# EAGLE board ArrayC_v2zp (EAGLE 7.5.0)
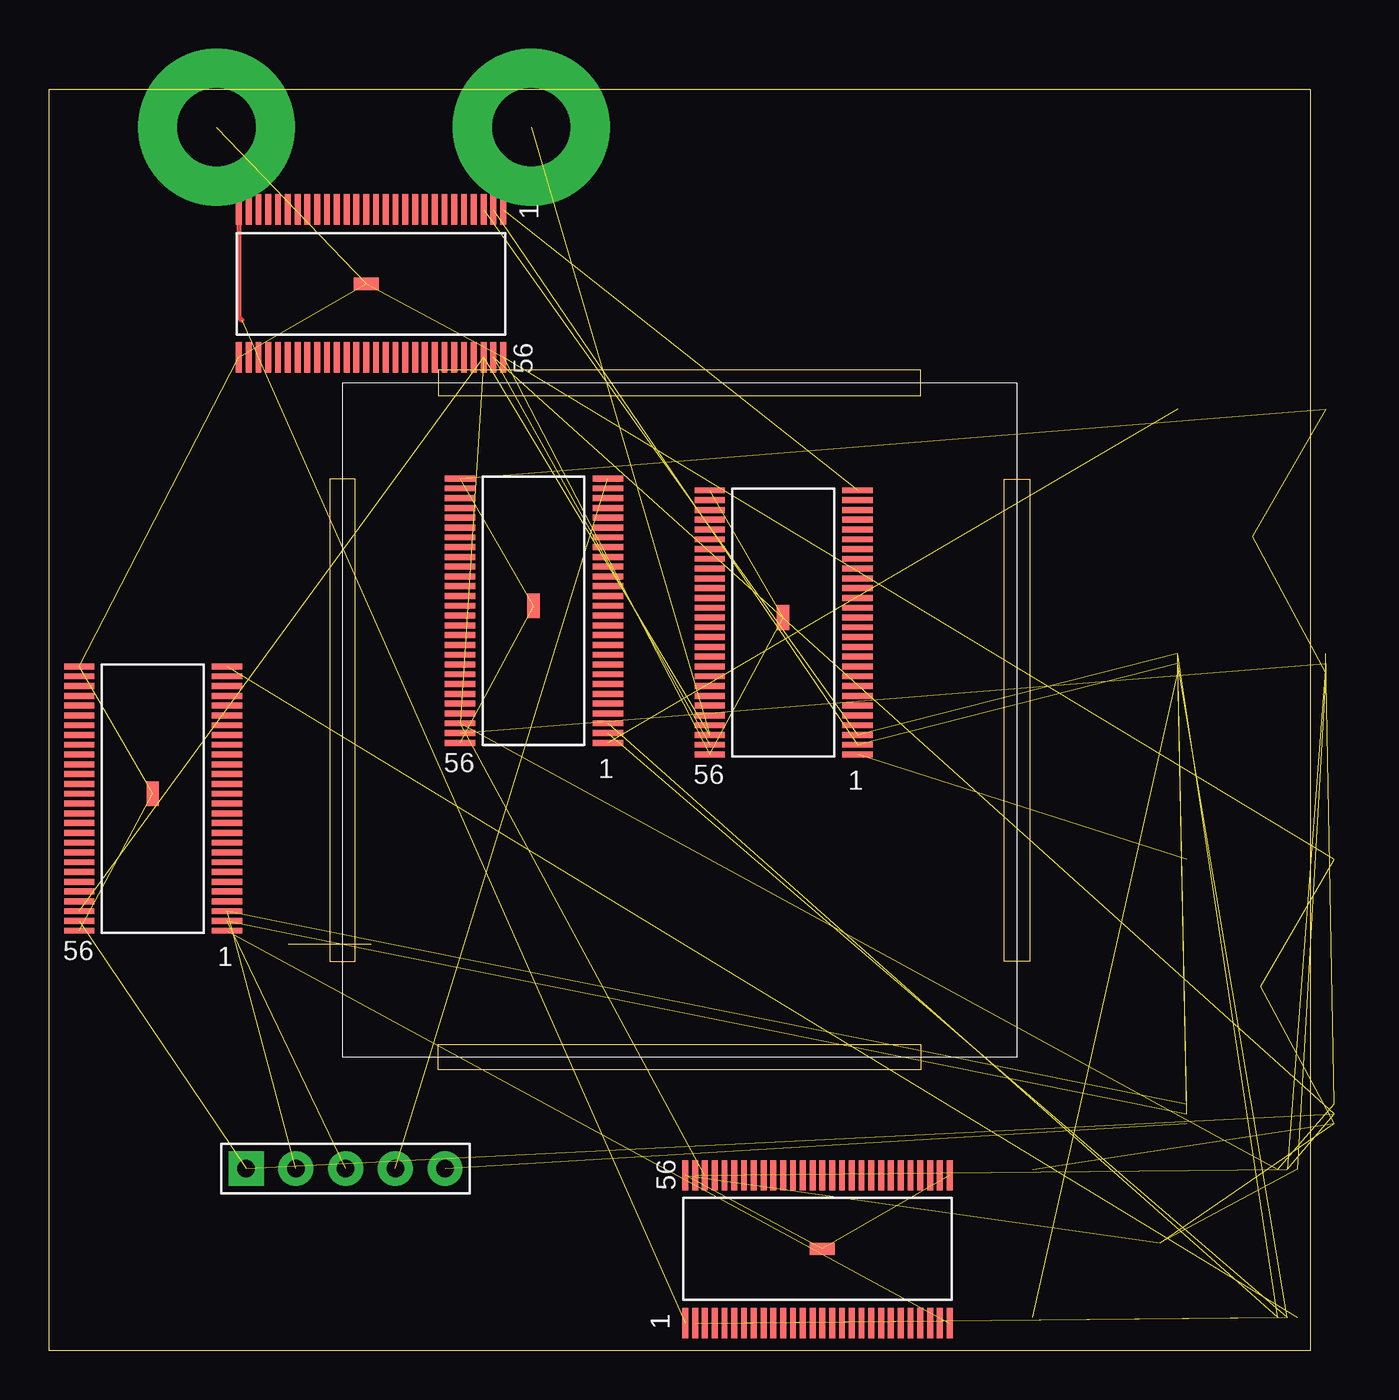
[diagram p0: board, top side]
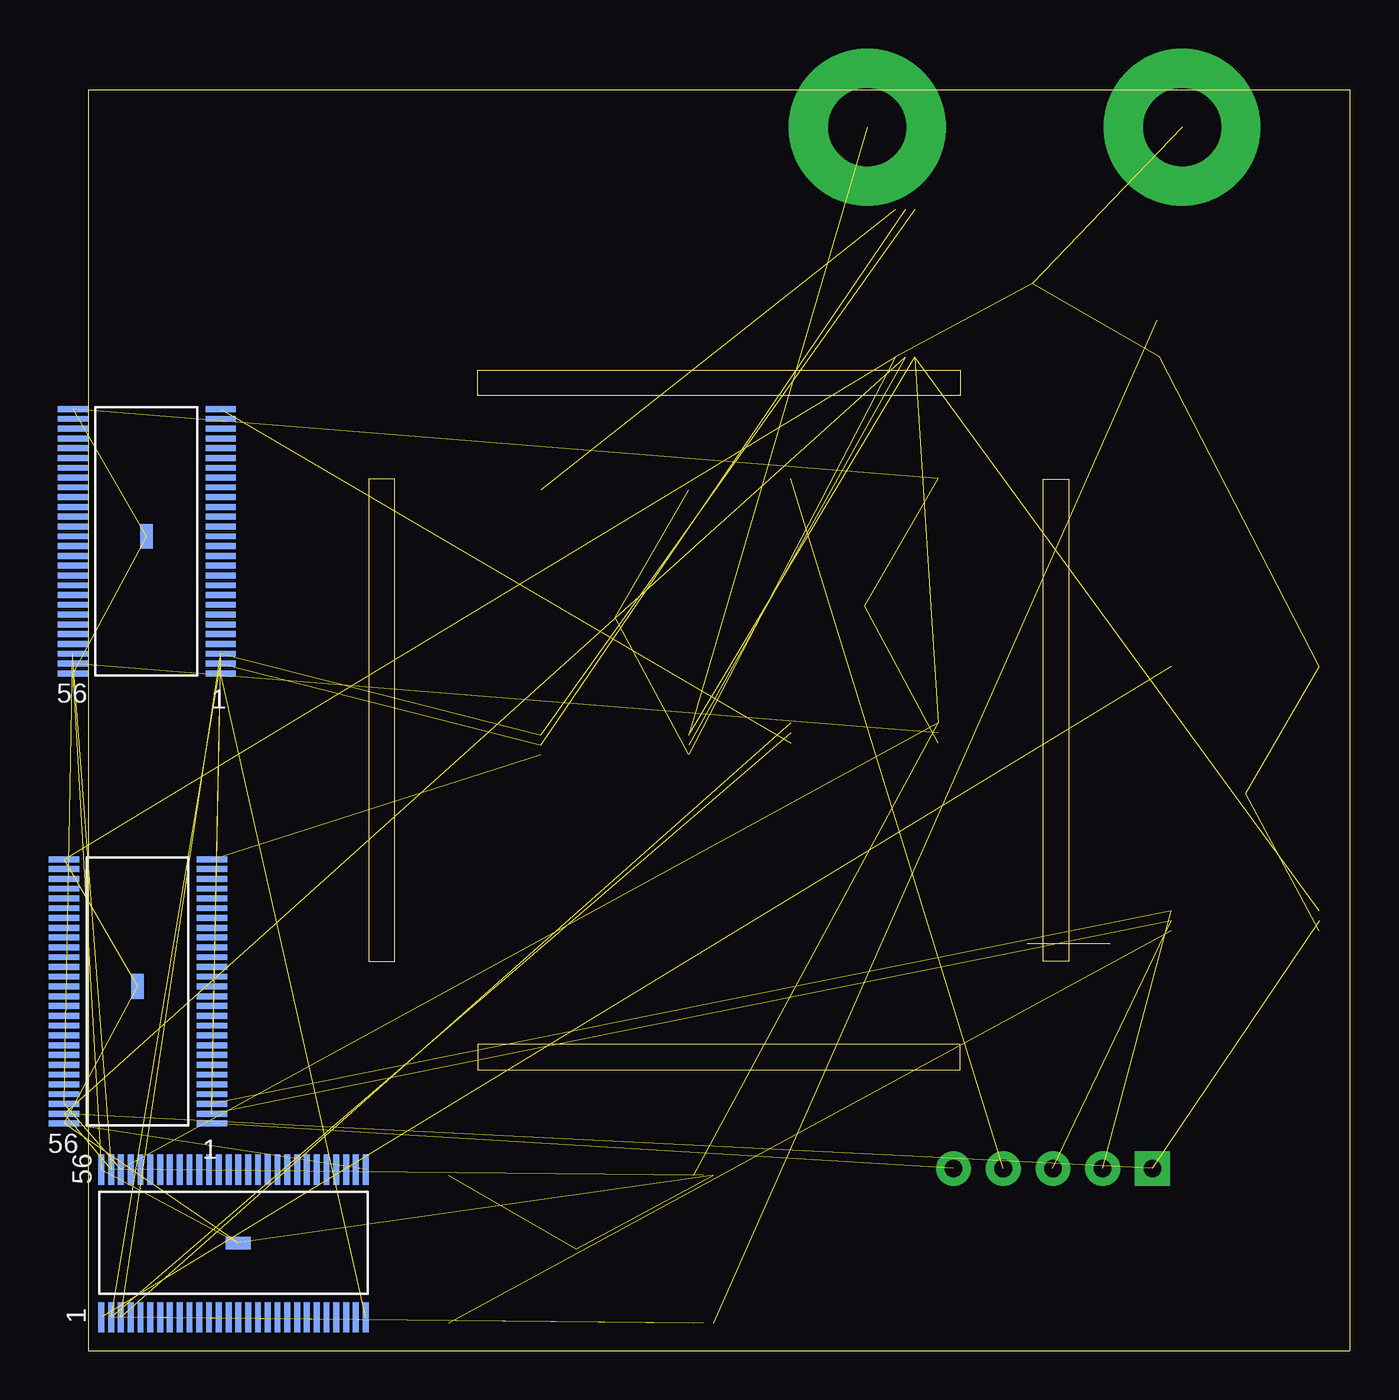
[diagram p1: board, bottom side, seen from below]

Size 64.42 x 64.42 mm. Coordinates in mm from the lower left corner, seen from the top.
Outline: 12.22,20.77 16.45,20.77
Outline: 48.78,44.53 50.08,44.53 50.08,19.89 48.78,19.89 48.78,44.53
Outline: 64.42,64.42 64.42,0 0,0 0,64.42 64.42,64.42
Outline: 44.53,48.78 44.53,50.08 19.89,50.08 19.89,48.78 44.53,48.78
Outline: 15.64,44.53 14.33,44.53 14.33,19.89 15.64,19.89 15.64,44.53
Outline: 44.53,15.64 44.53,14.33 19.89,14.33 19.89,15.64 44.53,15.64
Copper layers (1*16): Top 0.035mm / dielectric 1.5mm / Bottom 0.035mm
Design rules "SparkFun": minimum track width 8mil, minimum drill 20mil, track to track 8mil, track to pad 8mil, pad to pad 8mil, via to via 8mil, smd to smd 8mil, copper to edge 10mil, drill to drill 8mil, minimum pad ring 12mil, minimum via ring 10mil, stop-mask expansion 4mil, vias tented up to drill 25mil, thermal gap 10mil

## Footprints (pad centres in the part's own frame; a part is rotated, then mirrored left to right if it is on the bottom)
56-HTSSOP = smd 0.3 x 1.55: P1 -7,-3.8; P2 -6.5,-3.8; P3 -6,-3.8; P4 -5.5,-3.8; P5 -5,-3.8; P6 -4.5,-3.8; P7 -4,-3.8; P8 -3.5,-3.8; P9 -3,-3.8; P10 -2.5,-3.8; P11 -2,-3.8; P12 -1.5,-3.8; P13 -1,-3.8; P14 -0.5,-3.8; P15 0,-3.8; P16 0.5,-3.8; P17 1,-3.8; P18 1.5,-3.8; P19 2,-3.8; P20 2.5,-3.8; P21 3,-3.8; P22 3.5,-3.8; P23 4,-3.8; P24 4.5,-3.8; P25 5,-3.8; P26 5.5,-3.8; P27 6,-3.8; P28 6.5,-3.8; P29 6.5,3.75; P30 6,3.75; P31 5.5,3.75; P32 5,3.75; P33 4.5,3.75; P34 4,3.75; P35 3.5,3.75; P36 3,3.75; P37 2.5,3.75; P38 2,3.75; P39 1.5,3.75; P40 1,3.75; P41 0.5,3.75; P42 0,3.75; P43 -0.5,3.75; P44 -1,3.75; P45 -1.5,3.75; P46 -2,3.75; P47 -2.5,3.75; P48 -3,3.75; P49 -3.5,3.75; P50 -4,3.75; P51 -4.5,3.75; P52 -5,3.75; P53 -5.5,3.75; P54 -6,3.75; P55 -6.5,3.75; P56 -7,3.75 | smd 1.27 x 0.635: P$1 0,0
5PIN_HOLES = drill 0.9 pad 1.778 square: P1 -5.08,0 | drill 0.9 pad 1.778: P2 -2.54,0; P3 0,0; P4 2.54,0; P5 5.08,0
2PIN_HOLES_PWR = drill 4 pad 8: P$1 0,0; P$2 16.08,0

## Placement (x,y rotation side)
U$1  TLC5955V0  [56-HTSSOP]  5.3,28.45 90 top
U$2  TLC5955V0  [56-HTSSOP]  56.75,5.5 0 bottom
U$3  TLC5955V0  [56-HTSSOP]  61.9,18.6 90 bottom
U$4  TLC5955V0  [56-HTSSOP]  37.5,37.45 90 top
U$5  TLC5955V0  [56-HTSSOP]  16.2,54.5 180 top
U$6  TLC5955V0  [56-HTSSOP]  61.45,41.6 90 bottom
U$7  TLC5955V0  [56-HTSSOP]  39.5,5.2 0 top
U$8  TLC5955V0  [56-HTSSOP]  24.75,38.05 90 top
U$9  5_PINSV1  [5PIN_HOLES]  15.15,9.3 0 top
U$10  2PIN_PWR0.1HEADER  [2PIN_HOLES_PWR]  8.55,62.5 0 top

## Library data of the parts
U$1-U$10 = WallerLabLib

## Nets
3.3V: U$1.P54 U$2.P54 U$3.P54 U$4.P54 U$5.P54 U$6.P54 U$7.P54 U$8.P54 U$10.P$2
GND: U$1.P29 U$1.P56 U$1.P$1 U$2.P29 U$2.P56 U$2.P$1 U$3.P29 U$3.P56 U$3.P$1 U$4.P29 U$4.P56 U$4.P$1 U$5.P29 U$5.P56 U$5.P$1 U$6.P29 U$6.P56 U$6.P$1 U$7.P29 U$7.P56 U$7.P$1 U$8.P29 U$8.P56 U$8.P$1 U$10.P$1
GSCLK: U$1.P55 U$2.P55 U$3.P55 U$4.P55 U$5.P55 U$6.P55 U$7.P55 U$8.P55 U$9.P1
LAT: U$1.P3 U$2.P3 U$3.P3 U$4.P3 U$5.P3 U$6.P3 U$7.P3 U$8.P3 U$9.P2
N$1: U$1.P8
N$2: U$1.P9
N$3: U$1.P7
N$4: U$1.P14
N$5: U$1.P15
N$6: U$1.P13
N$7: U$1.P17
N$8: U$1.P18
N$9: U$1.P16
N$10: U$1.P23
N$11: U$1.P24
N$12: U$1.P22
N$13: U$1.P5
N$14: U$1.P6
N$15: U$1.P4
N$16: U$1.P11
N$17: U$1.P12
N$18: U$1.P10
N$19: U$1.P20
N$20: U$1.P21
N$21: U$1.P19
N$22: U$1.P26
N$23: U$1.P27
N$24: U$1.P25
N$25: U$1.P53
N$26: U$1.P51
N$27: U$1.P52
N$28: U$1.P47
N$29: U$1.P45
N$30: U$1.P46
N$31: U$1.P38
N$32: U$1.P36
N$33: U$1.P37
N$34: U$1.P32
N$35: U$1.P30
N$36: U$1.P50
N$37: U$1.P48
N$38: U$1.P49
N$39: U$1.P44
N$40: U$1.P42
N$41: U$1.P43
N$42: U$1.P41
N$43: U$1.P39
N$44: U$1.P40
N$45: U$1.P35
N$46: U$1.P33
N$47: U$1.P34
N$48: U$2.P8
N$49: U$2.P9
N$50: U$2.P7
N$51: U$2.P14
N$52: U$2.P15
N$53: U$2.P13
N$54: U$2.P17
N$55: U$2.P18
N$56: U$2.P16
N$57: U$2.P23
N$58: U$2.P24
N$59: U$2.P22
N$60: U$2.P5
N$61: U$2.P6
N$62: U$2.P4
N$63: U$2.P11
N$64: U$2.P12
N$65: U$2.P10
N$66: U$2.P20
N$67: U$2.P21
N$68: U$2.P19
N$69: U$2.P26
N$70: U$2.P27
N$71: U$2.P25
N$72: U$2.P53
N$73: U$2.P51
N$74: U$2.P52
N$75: U$2.P47
N$76: U$2.P45
N$77: U$2.P46
N$78: U$2.P38
N$79: U$2.P36
N$80: U$2.P37
N$81: U$2.P32
N$82: U$2.P30
N$83: U$2.P50
N$84: U$2.P48
N$85: U$2.P49
N$86: U$2.P44
N$87: U$2.P42
N$88: U$2.P43
N$89: U$2.P41
N$90: U$2.P39
N$91: U$2.P40
N$92: U$2.P35
N$93: U$2.P33
N$94: U$2.P34
N$95: U$3.P8
N$96: U$3.P9
N$97: U$3.P7
N$98: U$3.P14
N$99: U$3.P15
N$100: U$3.P13
N$101: U$3.P17
N$102: U$3.P18
N$103: U$3.P16
N$104: U$3.P23
N$105: U$3.P24
N$106: U$3.P22
N$107: U$3.P5
N$108: U$3.P6
N$109: U$3.P4
N$110: U$3.P11
N$111: U$3.P12
N$112: U$3.P10
N$113: U$3.P20
N$114: U$3.P21
N$115: U$3.P19
N$116: U$3.P26
N$117: U$3.P27
N$118: U$3.P25
N$119: U$3.P53
N$120: U$3.P51
N$121: U$3.P52
N$122: U$3.P47
N$123: U$3.P45
N$124: U$3.P46
N$125: U$3.P38
N$126: U$3.P36
N$127: U$3.P37
N$128: U$3.P32
N$129: U$3.P30
N$130: U$3.P50
N$131: U$3.P48
N$132: U$3.P49
N$133: U$3.P44
N$134: U$3.P42
N$135: U$3.P43
N$136: U$3.P41
N$137: U$3.P39
N$138: U$3.P40
N$139: U$3.P35
N$140: U$3.P33
N$141: U$3.P34
N$142: U$5.P8
N$143: U$4.P8
N$144: U$4.P9
N$145: U$4.P7
N$146: U$4.P14
N$147: U$4.P15
N$148: U$4.P13
N$149: U$4.P17
N$150: U$4.P18
N$151: U$4.P16
N$152: U$4.P23
N$153: U$4.P24
N$154: U$4.P22
N$155: U$4.P5
N$156: U$4.P6
N$157: U$4.P4
N$158: U$4.P11
N$159: U$4.P12
N$160: U$4.P10
N$161: U$4.P20
N$162: U$4.P21
N$163: U$4.P19
N$164: U$4.P26
N$165: U$4.P27
N$166: U$4.P25
N$167: U$4.P53
N$168: U$4.P51
N$169: U$4.P52
N$170: U$4.P47
N$171: U$4.P45
N$172: U$4.P46
N$173: U$4.P38
N$174: U$4.P36
N$175: U$4.P37
N$176: U$4.P32
N$177: U$4.P30
N$178: U$4.P50
N$179: U$4.P48
N$180: U$4.P49
N$181: U$4.P44
N$182: U$4.P42
N$183: U$4.P43
N$184: U$4.P41
N$185: U$4.P39
N$186: U$4.P40
N$187: U$4.P35
N$188: U$4.P33
N$189: U$4.P34
N$190: U$5.P9
N$191: U$5.P7
N$192: U$5.P14
N$193: U$5.P15
N$194: U$5.P13
N$195: U$5.P17
N$196: U$5.P18
N$197: U$5.P16
N$198: U$5.P23
N$199: U$5.P24
N$200: U$5.P22
N$201: U$5.P5
N$202: U$5.P6
N$203: U$5.P4
N$204: U$5.P11
N$205: U$5.P12
N$206: U$5.P10
N$207: U$5.P20
N$208: U$5.P21
N$209: U$5.P19
N$210: U$5.P26
N$211: U$5.P27
N$212: U$5.P25
N$213: U$5.P53
N$214: U$5.P51
N$215: U$5.P52
N$216: U$5.P47
N$217: U$5.P45
N$218: U$5.P46
N$219: U$5.P38
N$220: U$5.P36
N$221: U$5.P37
N$222: U$5.P32
N$223: U$5.P30
N$224: U$5.P50
N$225: U$5.P48
N$226: U$5.P49
N$227: U$5.P44
N$228: U$5.P42
N$229: U$5.P43
N$230: U$5.P41
N$231: U$5.P39
N$232: U$5.P40
N$233: U$5.P35
N$234: U$5.P33
N$235: U$5.P34
N$236: U$6.P8
N$237: U$6.P9
N$238: U$6.P7
N$239: U$6.P14
N$240: U$6.P15
N$241: U$6.P13
N$242: U$6.P17
N$243: U$6.P18
N$244: U$6.P16
N$245: U$6.P23
N$246: U$6.P24
N$247: U$6.P22
N$248: U$6.P5
N$249: U$6.P6
N$250: U$6.P4
N$251: U$6.P11
N$252: U$6.P12
N$253: U$6.P10
N$254: U$6.P20
N$255: U$6.P21
N$256: U$6.P19
N$257: U$6.P26
N$258: U$6.P27
N$259: U$6.P25
N$260: U$6.P53
N$261: U$6.P51
N$262: U$6.P52
N$263: U$6.P47
N$264: U$6.P45
N$265: U$6.P46
N$266: U$6.P38
N$267: U$6.P36
N$268: U$6.P37
N$269: U$6.P32
N$270: U$6.P30
N$271: U$6.P50
N$272: U$6.P48
N$273: U$6.P49
N$274: U$6.P44
N$275: U$6.P42
N$276: U$6.P43
N$277: U$6.P41
N$278: U$6.P39
N$279: U$6.P40
N$280: U$6.P35
N$281: U$6.P33
N$282: U$6.P34
N$283: U$7.P8
N$284: U$7.P9
N$285: U$7.P7
N$286: U$7.P14
N$287: U$7.P15
N$288: U$7.P13
N$289: U$7.P17
N$290: U$7.P18
N$291: U$7.P16
N$292: U$7.P23
N$293: U$7.P24
N$294: U$7.P22
N$295: U$7.P5
N$296: U$7.P6
N$297: U$7.P4
N$298: U$7.P11
N$299: U$7.P12
N$300: U$7.P10
N$301: U$7.P20
N$302: U$7.P21
N$303: U$7.P19
N$304: U$7.P26
N$305: U$7.P27
N$306: U$7.P25
N$307: U$7.P53
N$308: U$7.P51
N$309: U$7.P52
N$310: U$7.P47
N$311: U$7.P45
N$312: U$7.P46
N$313: U$7.P38
N$314: U$7.P36
N$315: U$7.P37
N$316: U$7.P32
N$317: U$7.P30
N$318: U$7.P50
N$319: U$7.P48
N$320: U$7.P49
N$321: U$7.P44
N$322: U$7.P42
N$323: U$7.P43
N$324: U$7.P41
N$325: U$7.P39
N$326: U$7.P40
N$327: U$7.P35
N$328: U$7.P33
N$329: U$7.P34
N$330: U$8.P8
N$331: U$8.P9
N$332: U$8.P7
N$333: U$8.P14
N$334: U$8.P15
N$335: U$8.P13
N$336: U$8.P17
N$337: U$8.P18
N$338: U$8.P16
N$339: U$8.P23
N$340: U$8.P24
N$341: U$8.P22
N$342: U$8.P5
N$343: U$8.P6
N$344: U$8.P4
N$345: U$8.P11
N$346: U$8.P12
N$347: U$8.P10
N$348: U$8.P20
N$349: U$8.P21
N$350: U$8.P19
N$351: U$8.P26
N$352: U$8.P27
N$353: U$8.P25
N$354: U$8.P53
N$355: U$8.P51
N$356: U$8.P52
N$357: U$1.P28 U$2.P1
N$358: U$2.P28 U$6.P1
N$359: U$6.P28 U$8.P1
N$360: U$1.P1 U$7.P28
N$361: U$5.P28 U$7.P1
N$362: U$4.P28 U$5.P1
N$363: U$3.P28 U$4.P1
N$364: U$7.P31
N$365: U$3.P1 U$9.P5
N$366: U$8.P28 U$9.P4
N$368: U$2.P31
N$370: U$1.P31
N$371: U$6.P31
N$372: U$5.P31
N$373: U$4.P31
N$375: U$3.P31
SCLK: U$1.P2 U$2.P2 U$3.P2 U$4.P2 U$5.P2 U$6.P2 U$7.P2 U$8.P2 U$9.P3

## Tracks (layer width: path | path; a pad name or v marks a point on that pad's centre or on a via)
3.3V  (8 unrouted)
GND  (24 unrouted)
GSCLK  (8 unrouted)
LAT  (8 unrouted)
N$357  (1 unrouted)
N$358  (1 unrouted)
N$359  (1 unrouted)
N$360  (1 unrouted)
N$361  (1 unrouted)
  Top 0.25: U$5.P28 9.7,52.8 9.85,52.65
N$362  (1 unrouted)
N$363  (1 unrouted)
N$365  (1 unrouted)
N$366  (1 unrouted)
SCLK  (8 unrouted)